# Allegro board emoji-car-pcb.brd
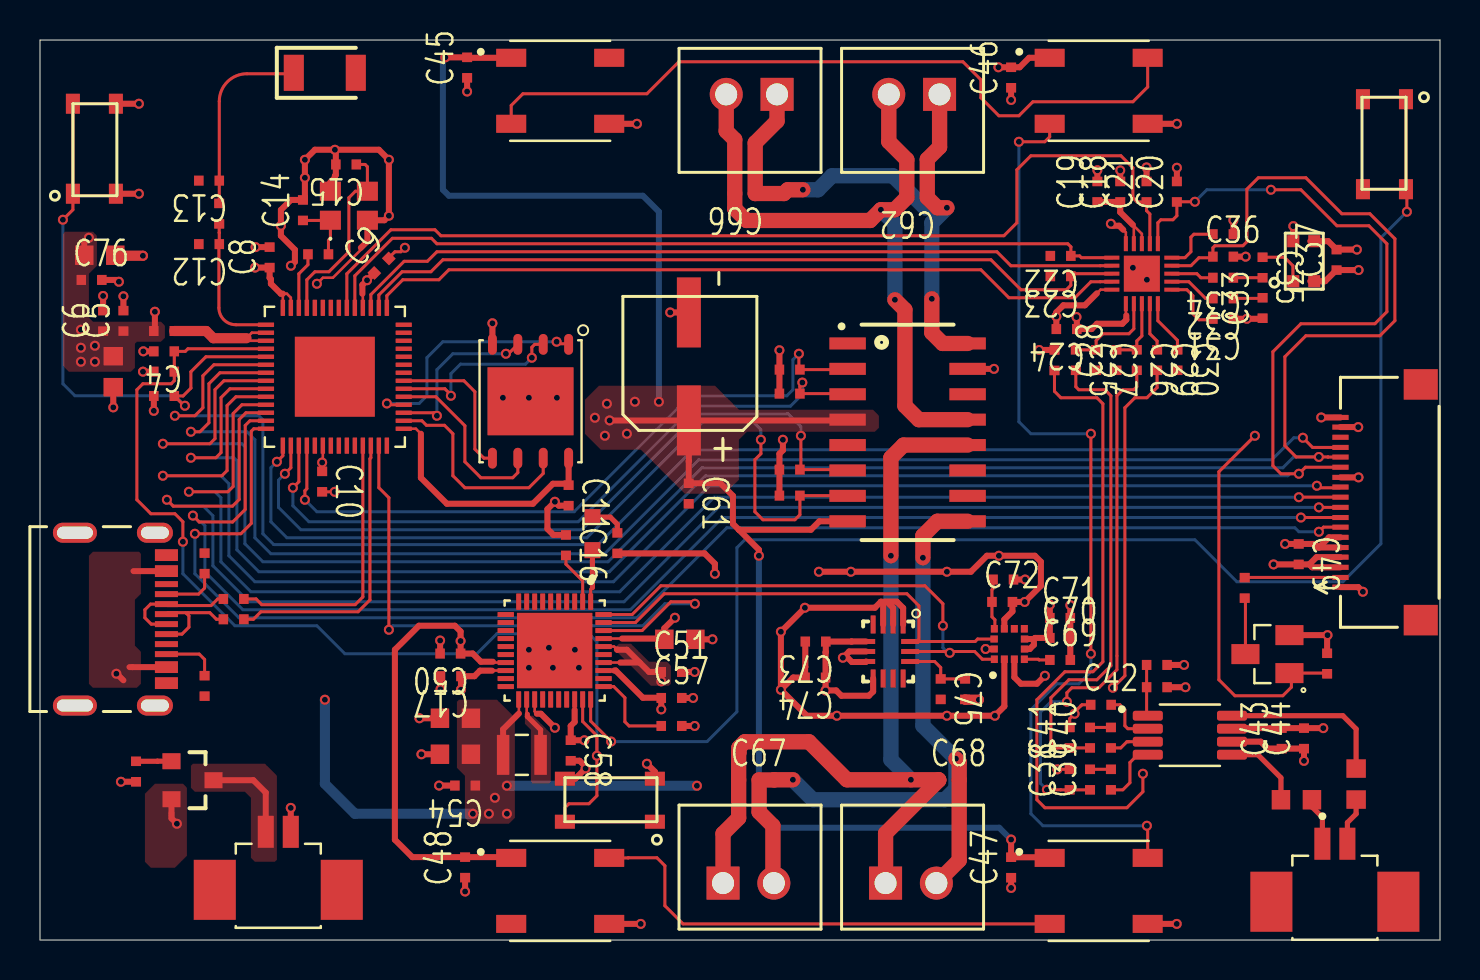
[diagram p0: board, top side]
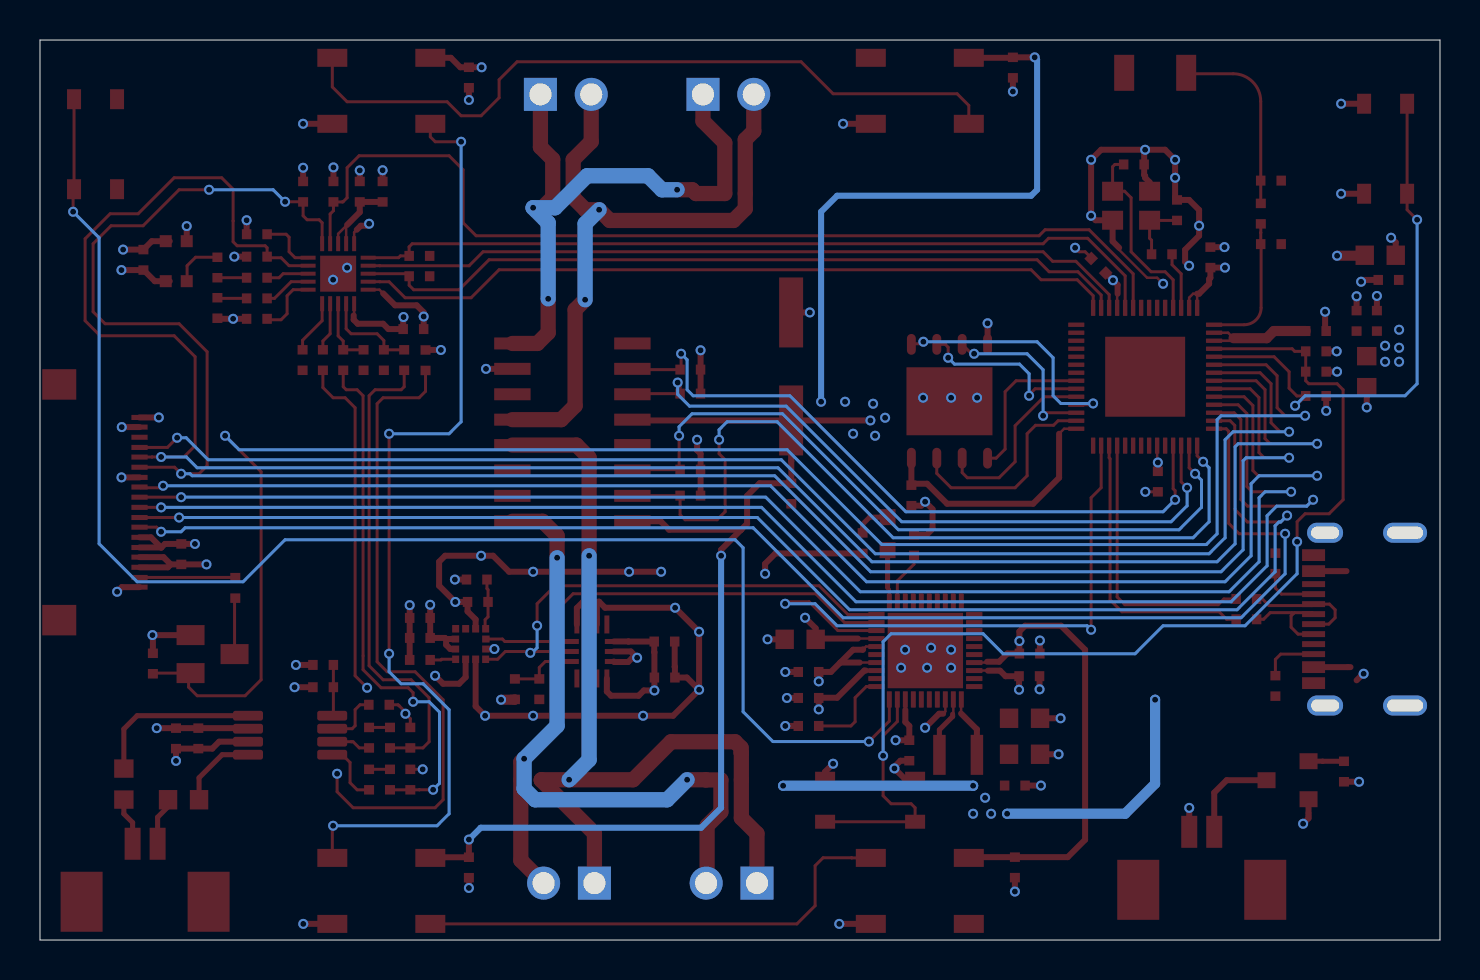
[diagram p1: board, bottom side, seen from below]

Outline 70 x 45 mm; copper layers: TOP, GND, PWR, BOTTOM. Coordinates in mm from the lower left corner of the outline.
Outline path: 0,45 0,0 70,0 70,45 0,45

## Design rules (mm)
constraint set DEFAULT: min track width 0.15
net group ESP_DP: nets ESP_DN ESP_DP
net group USB: nets USB_DN USB_DP

## Placement (name value [footprint] x y rotation side)
ANT1  ANT3216LL00R2400A  [ANTC3216X135N]  14.24 43.36 0 top
C4  1uF  [C0402]  6.2 29.43 180 top
C5  100nF  [C0402]  4.17 30.96 90 top
C6  1uF  [C0402]  3.15 30.96 90 top
C7  10uF  [C0603]  3.66 28.42 270 top
C8  100nF  [C0402]  11.48 34.13 90 top
C9  100nF  [C0402]  17.08 33.71 45 top
C10  100nF  [C0402]  14.11 22.92 270 top
C11  100nF  [C0402]  26.43 22.23 270 top
C12  -  [C0402]  8.45 34.79 180 top
C13  -  [C0402]  8.45 37.97 180 top
C14  15pF  [C0402]  13.15 36.49 90 top
C15  15pF  [C0402]  15.3 38.78 180 top
C16  1uF  [C0402]  26.3 19.74 270 top
C17  2.2uF  [C0402]  20.53 13.19 180 top
C18  100nF  [C0402]  54.01 37.41 90 top
C19  100nF  [C0402]  52.87 37.41 90 top
C20  22pF  [C0402]  56.84 37.41 90 top
C21  22pF  [C0402]  55.33 37.41 90 top
C22  22pF  [C0402]  51.03 34.2 180 top
C23  22pF  [C0402]  51.03 33.19 180 top
C24  1uF  [C0402]  51.33 30.55 180 top
C25  1uF  [C0402]  51.79 29 270 top
C26  1uF  [C0402]  54.84 29 270 top
C27  22pF  [C0402]  52.81 29 270 top
C28  22pF  [C0402]  53.82 29 90 top
C29  1uF  [C0402]  55.85 29 270 top
C30  1uF  [C0402]  56.87 29 270 top
C31  1uF  [C0402]  59.16 31.06 180 top
C32  1uF  [C0402]  59.16 32.08 180 top
C33  1uF  [C0402]  61.13 31.6 90 top
C34  1uF  [C0402]  59.16 33.11 180 top
C35  1uF  [C0402]  61.13 33.62 270 top
C36  22pF  [C0402]  59.16 34.17 0 top
C37  100nF  [C0402]  64.83 34.01 90 top
C38  22pF  [C0402]  51.48 8.02 90 top
C39  100nF  [C0402]  52.5 8.02 90 top
C40  100nF  [C0402]  52.5 10.12 90 top
C41  22pF  [C0402]  51.48 10.12 90 top
C42  1uF  [C0402]  53.05 11.76 0 top
C43  1uF  [C0402]  62.08 10.08 90 top
C44  1uF  [C0402]  63.2 10.08 90 top
C45  100nF  [C0402]  21.35 43.62 90 top
C46  100nF  [C0402]  48.55 43.12 90 top
C47  100nF  [C0402]  48.55 3.63 90 top
C48  100nF  [C0402]  21.25 3.63 90 top
C49  100nF  [C0402]  62.93 19.29 270 top
C50  1uF  [C0402]  20.52 14.32 180 top
C51  1uF  [C0402]  31.57 13.4 0 top
C52  22uF  [C0603]  20.77 9.29 180 top
C53  22uF  [C0603]  20.77 11.09 180 top
C54  100nF  [C0402]  21.26 7.72 180 top
C57  1uF  [C0402]  31.57 12.1 0 top
C58  1uF  [C0402]  26.53 9.48 270 top
C59  22uF  [C0603]  31.99 15.03 0 top
C60  100uF  [SMD_2P_63_54]  -232.16 -222.42 0 top
C61  100nF  [C0402]  32.43 22.32 270 top
C62  100nF  [C0402]  43.85 37.12 180 top
C66  100nF  [C0402]  35.25 37.32 180 top
C67  100nF  [C0402]  35.44 8 0 top
C68  100nF  [C0402]  45.45 8 0 top
C69  100nF  [C0402]  51 14 0 top
C70  100nF  [C0402]  51 15.1 0 top
C71  1uF  [C0402]  51 16.1 0 top
C72  100nF  [C0402]  48.11 16.9 0 top
C73  100nF  [C0402]  38.78 14.92 180 top
C74  1uF  [C0402]  38.77 13.12 180 top
C75  100nF  [C0402]  45.03 12.54 270 top
C76  100nF  [C0402]  2.58 33 0 top
D1  LED_B  [LED_APT1608QBC_D]  27.62 20.32 90 top
IC1  ES8311  [QFN40P300X300X60-21N]  55.09 33.32 270 top
J1  TYPEC-16P  [MOLEX_2171790001]  2.9 16.04 270 top
J2  ZX-MX1.25-2PLT  [AMPHENOL_10114830-10102LF]  11.91 2.71 0 top
J4  ZX-XH2.54-2PZZ  [HX254-1X2]  44.98 42.28 0 top
J5  ZX-XH2.54-2PZZ  [HX254-1X2]  36.85 42.28 0 top
J6  ZX-XH2.54-2PZZ  [HX254-1X2]  42.28 2.84 180 top
J7  ZX-XH2.54-2PZZ  [HX254-1X2]  34.15 2.84 180 top
J8  ZX-MX1.25-2PLT  [AMPHENOL_10114830-10102LF]  64.74 2.11 0 top
L4  WPN252012H1R0MT  [IND_LQH2HPZ1R0MGRL]  24.09 9.26 180 top
L5  LQG15HS2N0S02D  [R0402]  8.96 36.32 90 top
L6  MLG1005S2N0BT000  [R0402]  6.2 30.45 180 top
L7  SDCL1005C24NJTDF  [R0402]  13.91 34.29 0 top
L8  GZ1608D601TF  [C0603]  65.81 7.8 90 top
L9  GZ1608D601TF  [C0603]  62.82 7.01 180 top
L10  BLM18PG121SN1D  [C0603]  2.99 34.24 0 top
Q1  AO3401A  [SOT23-3]  7.57 7.99 180 top
Q2  S8050  [SOT95P240X120-3N]  61.37 14.29 90 top
R1  10K  [R0402]  6.2 28.42 0 top
R2  10K  [R0402]  6.2 27.2 0 top
R3  1K  [R0402]  28.87 19.84 90 top
R4  10K  [R0402]  4.8 8.42 270 top
R5  5.1K  [R0402]  8.23 18.83 270 top
R6  5.1K  [R0402]  8.23 12.7 90 top
R7  22  [R0402]  9.68 17.05 0 top
R8  22  [R0402]  9.68 16.04 0 top
R9  0  [R0402]  50.72 28.99 90 top
R10  10K  [R0402]  59.16 35.29 180 top
R11  150K  [R0402]  53.55 8.02 270 top
R12  150K  [R0402]  53.55 10.12 270 top
R13  10K  [R0402]  55.84 12.64 0 top
R14  10K  [R0402]  55.84 13.75 180 top
R15  10K  [R0402]  31.57 10.7 0 top
R16  10K  [R0402]  37.48 28.52 180 top
R17  10K  [R0402]  37.48 27.32 180 top
R18  10K  [R0402]  37.48 23.52 180 top
R19  10K  [R0402]  37.48 22.22 180 top
R20  10  [R0402]  60.23 17.61 270 top
R21  1K  [R0402]  64.35 13.82 90 top
R22  10K  [R0402]  48.16 18.02 180 top
R23  10K  [R0402]  46.25 12.54 90 top
S1  TS3425BA  [SMD_4P_42_32]  66 43.04 270 top
S2  TS3425BA  [SMD_4P_42_32]  31.74 8.21 180 top
S3  TS3425BA  [SMD_4P_42_32]  3.94 36.31 90 top
U1  ESP32-S3R8  [QFN40P700X700X90-57N]  14.74 28.16 0 top
U2  -  [W25Q128JVPIQ]  24.53 26.94 270 top
U3  TC1508S  [SOIC127P686X203-16N]  43.38 25.38 0 top
U4  XF2M-1815-1A  [OMRON_XF2M-1815-1A]  62.59 21.89 270 top
U5  ZTS6216  [SMD_4P_28_19]  63.96 34.94 180 top
U6  AXP2101  [QFN40P500X500X90-41N]  25.73 14.47 270 top
U7  LIS3MDLTR  [XDCR_LIS3MDLTR]  48.47 14.8 90 top
U8  LSM6DS3TR-C  [LGA-14-25X3MM]  42.41 14.43 270 top
U9  NS4150B  [SOP65P490X110-8N]  57.49 10.24 0 top
U10  WS2812B-B  [LED_WS2812B-B]  26.01 42.46 0 top
U11  WS2812B-B  [LED_WS2812B-B]  52.93 42.46 0 top
U12  WS2812B-B  [LED_WS2812B-B]  26.01 2.45 0 top
U13  WS2812B-B  [LED_WS2812B-B]  52.93 2.45 0 top
Y1  SX2B40.000F1510F30  [KC2520K120000C10E00]  15.44 36.71 0 top

## Library data of the parts
ANT1 = ANT3216LL00R2400A
C4-C6 C8-C51 C54 C57 C58 C61 C62 C66-C76 = C0402
C7 C52 C53 C59 = C0603
C60 = CAPACITOR POL
D1 = LED
IC1 = ES8311
J1 = TYPEC - 16Pin
J2 J8 = ZX-MX1.25-2PLT
J4-J7 = ZX-XH2.54-2PZZ
L4 = WPN252012H1R0MT
L5 = LQG15HS2N0S02D
L6 = MLG1005S2N0BT000
L7 = SDCL1005C24NJTDF
L8 L9 = GZ1608D601TF
L10 = BLM18PG121SN1D
Q1 = AO3401A
Q2 = S8050
R1-R23 = R0402
S1-S3 = TS3425BA
U1 = ESP32-S3R8
U2 = W25Q128JVPIQ
U3 = TC1508S
U4 = FPC-18Pin
U5 = ZTS6216
U6 = AXP2101
U7 = LIS3MDLTR
U8 = LSM6DS3TR-C
U9 = NS4150B
U10-U13 = WS2812B-B
Y1 = SX2B40.000F1510F30

## Footprints (pads in the part's own frame, mm; a bottom-side part is the same pattern mirrored in y, then rotated)
AMPHENOL_10114830-10102LF
  rect 0.8x1.6 smd: 1(-0.625,2.7) 2(0.625,2.7)
  rect 2.1x3 smd: SH1(-3.175,-0.2) SH2(3.175,-0.2)
ANTC3216X135N
  rect 1x1.8 smd: 1(-1.55,0) 2(1.55,0)
C0402
  rect 0.475x0.5 smd: 1(-0.512,0) 2(0.512,0)
C0603
  rect 0.92x0.97 smd: 1(-0.775,0) 2(0.775,0)
HX254-1X2
  rect 1.65x1.65 hole 1.1: 1(0,0)
  round 1.65 hole 1.1: 2(-2.54,0)
IND_LQH2HPZ1R0MGRL
  rect 0.625x2 smd: 1(-0.938,0) 2(0.938,0)
KC2520K120000C10E00
  rect 1.05x0.95 smd: 1(-0.925,-0.725) 2(0.925,-0.725) 3(0.925,0.725) 4(-0.925,0.725)
LED_APT1608QBC_D
  rect 0.8x0.8 smd: 1(-0.825,0) 2(0.825,0)
LED_WS2812B-B
  rect 1.5x0.9 smd: 1(-2.45,1.65) 2(-2.45,-1.65) 3(2.45,-1.65) 4(2.45,1.65)
LGA-14-25X3MM
  rect 0.9x0.25 smd: 1(-1.35,0.75) 2(-1.35,0.25) 3(-1.35,-0.25) 4(-1.35,-0.75) 8(1.35,-0.75) 9(1.35,-0.25) 10(1.35,0.25) 11(1.35,0.75)
  rect 0.25x0.9 smd: 5(-0.5,-1.1) 6(0,-1.1) 7(0.5,-1.1) 12(0.5,1.1) 13(0,1.1) 14(-0.5,1.1)
MOLEX_2171790001
  rect 0.59x1.15 smd: A1B12(-3.2,3.425) A4B9(-2.4,3.425) B1A12(3.2,3.425) B4A9(2.4,3.425)
  rect 0.298x1.15 smd: A5(-1.25,3.425) A6(-0.25,3.425) A7(0.25,3.425) A8(1.25,3.425) B5(1.75,3.425) B6(0.75,3.425) B7(-0.75,3.425) B8(-1.75,3.425)
  oval 1x2.2 hole 0.6x1.8: SH1(-4.32,-1.15) SH2(4.32,-1.15)
  oval 1x1.8 hole 0.6x1.4: SH3(-4.32,2.85) SH4(4.32,2.85)
OMRON_XF2M-1815-1A
  rect 0.254x0.813 smd: 1(4.242,2.438) 2(3.759,2.438) 3(3.251,2.438) 4(2.743,2.438) 5(2.261,2.438) 6(1.753,2.438) 7(1.245,2.438) 8(0.762,2.438) 9(0.254,2.438) 10(-0.254,2.438) 11(-0.762,2.438) 12(-1.245,2.438) 13(-1.753,2.438) 14(-2.261,2.438) 15(-2.743,2.438) 16(-3.251,2.438) 17(-3.759,2.438) 18(-4.242,2.438)
  rect 1.524x1.702 smd: 19(-5.893,6.452) 20(5.893,6.452)
QFN40P300X300X60-21N
  rect 0.75x0.2 smd: 1(-1.5,0.8) 2(-1.5,0.4) 3(-1.5,0) 4(-1.5,-0.4) 5(-1.5,-0.8) 11(1.5,-0.8) 12(1.5,-0.4) 13(1.5,0) 14(1.5,0.4) 15(1.5,0.8)
  rect 0.2x0.75 smd: 6(-0.8,-1.5) 7(-0.4,-1.5) 8(0,-1.5) 9(0.4,-1.5) 10(0.8,-1.5) 16(0.8,1.5) 17(0.4,1.5) 18(0,1.5) 19(-0.4,1.5) 20(-0.8,1.5)
  rect 1.8x1.8 smd: 21(0,0)
QFN40P500X500X90-41N
  custom 0.82x0.25 smd: 1(-2.445,1.8) 2(-2.445,1.4) 3(-2.445,1) 4(-2.445,0.6) 5(-2.445,0.2) 6(-2.445,-0.2) 7(-2.445,-0.6) 8(-2.445,-1) 9(-2.445,-1.4) 10(-2.445,-1.8) 21(2.445,-1.8) 22(2.445,-1.4) 23(2.445,-1) 24(2.445,-0.6) 25(2.445,-0.2) 26(2.445,0.2) 27(2.445,0.6) 28(2.445,1) 29(2.445,1.4) 30(2.445,1.8)
  custom 0.25x0.82 smd: 11(-1.8,-2.445) 12(-1.4,-2.445) 13(-1,-2.445) 14(-0.6,-2.445) 15(-0.2,-2.445) 16(0.2,-2.445) 17(0.6,-2.445) 18(1,-2.445) 19(1.4,-2.445) 20(1.8,-2.445) 31(1.8,2.445) 32(1.4,2.445) 33(1,2.445) 34(0.6,2.445) 35(0.2,2.445) 36(-0.2,2.445) 37(-0.6,2.445) 38(-1,2.445) 39(-1.4,2.445) 40(-1.8,2.445)
  rect 3.77x3.77 smd: 41(0,0)
QFN40P700X700X90-57N
  custom 0.81x0.22 smd: 1(-3.445,2.6) 2(-3.445,2.2) 3(-3.445,1.8) 4(-3.445,1.4) 5(-3.445,1) 6(-3.445,0.6) 7(-3.445,0.2) 8(-3.445,-0.2) 9(-3.445,-0.6) 10(-3.445,-1) 11(-3.445,-1.4) 12(-3.445,-1.8) 13(-3.445,-2.2) 14(-3.445,-2.6) 29(3.445,-2.6) 30(3.445,-2.2) 31(3.445,-1.8) 32(3.445,-1.4) 33(3.445,-1) 34(3.445,-0.6) 35(3.445,-0.2) 36(3.445,0.2) 37(3.445,0.6) 38(3.445,1) 39(3.445,1.4) 40(3.445,1.8) 41(3.445,2.2) 42(3.445,2.6)
  custom 0.22x0.81 smd: 15(-2.6,-3.445) 16(-2.2,-3.445) 17(-1.8,-3.445) 18(-1.4,-3.445) 19(-1,-3.445) 20(-0.6,-3.445) 21(-0.2,-3.445) 22(0.2,-3.445) 23(0.6,-3.445) 24(1,-3.445) 25(1.4,-3.445) 26(1.8,-3.445) 27(2.2,-3.445) 28(2.6,-3.445) 43(2.6,3.445) 44(2.2,3.445) 45(1.8,3.445) 46(1.4,3.445) 47(1,3.445) 48(0.6,3.445) 49(0.2,3.445) 50(-0.2,3.445) 51(-0.6,3.445) 52(-1,3.445) 53(-1.4,3.445) 54(-1.8,3.445) 55(-2.2,3.445) 56(-2.6,3.445)
  rect 4x4 smd: 57(0,0)
R0402
  rect 0.475x0.5 smd: 1(-0.512,0) 2(0.512,0)
SMD_2P_63_54
  rect 1.2x3.5 smd: 1(264.6,248.4) 2(264.6,253.8)
SMD_4P_28_19
  rect 0.6x0.6 smd: 1(1.3,2) 2(1.3,0) 3(0.25,0) 4(0.25,2)
SMD_4P_42_32
  rect 1x0.7 smd: 1(1,2.3) 2(5.5,2.3) 3(1,0.15) 4(5.5,0.15)
SOIC127P686X203-16N
  rect 1.82x0.6 smd: 1(-3,4.445) 2(-3,3.175) 3(-3,1.905) 4(-3,0.635) 5(-3,-0.635) 6(-3,-1.905) 7(-3,-3.175) 8(-3,-4.445) 9(3,-4.445) 10(3,-3.175) 11(3,-1.905) 12(3,-0.635) 13(3,0.635) 14(3,1.905) 15(3,3.175) 16(3,4.445)
SOP65P490X110-8N
  custom 1.5x0.49 smd: 1(-2.105,0.975) 2(-2.105,0.325) 3(-2.105,-0.325) 4(-2.105,-0.975) 5(2.105,-0.975) 6(2.105,-0.325) 7(2.105,0.325) 8(2.105,0.975)
SOT23-3
  rect 0.9x0.8 smd: 1(1,-0.95) 2(1,0.95) 3(-1.1,0)
SOT95P240X120-3N
  rect 1x1.4 smd: 1(-0.95,-1.1) 2(0.95,-1.1) 3(0,1.1)
W25Q128JVPIQ
  oval 1.04x0.445 smd: 1(-2.846,1.905) 2(-2.846,0.635) 3(-2.846,-0.635) 4(-2.846,-1.905) 5(2.846,-1.905) 6(2.846,-0.635) 7(2.846,0.635) 8(2.846,1.905)
  rect 3.4x4.3 smd: 9(0,0)
XDCR_LIS3MDLTR
  rect 0.375x0.35 smd: 1(-0.762,0.75) 2(-0.762,0.25) 3(-0.762,-0.25) 4(-0.762,-0.75) 7(0.762,-0.75) 8(0.762,-0.25) 9(0.762,0.25) 10(0.762,0.75)
  rect 0.35x0.375 smd: 5(-0.25,-0.762) 6(0.25,-0.762) 11(0.25,0.762) 12(-0.25,0.762)

## Nets
GND: C4.2 C5.2 C6.2 C7.2 C8.2 C9.2 C10.2 C11.2 C12.2 C13.2 C14.2 C15.2 C16.1 C17.2 C45.1 C46.1 C47.1 C48.1 C49.1 C50.2 C51.2 C52.2 C53.2 C54.2 C57.2 C58.2 C59.2 C60.2 C61.2 C69.2 C70.2 C71.2 C72.2 C73.2 C74.2 C75.2 C76.2 J1.A1B12 J1.B1A12 J1.SH1 J1.SH2 J1.SH3 J1.SH4 J2.2 Q2.2(E) R4.2 R5.1 R6.1 R9.2 R15.2 R16.2 R17.2 R18.2 R19.2 R21.2 S1.3 S1.4 S2.3 S2.4 S3.3 S3.4 U1.57 U2.4 U2.9 U3.11 U3.15 U4.1 U4.5 U4.6 U4.12 U4.18 U6.3 U6.41 U7.2 U7.3 U7.9 U7.12 U8.1 U8.2 U8.3 U8.6 U8.7 U10.3(VSS) U11.3(VSS) U12.3(VSS) U13.3(VSS) Y1.2 Y1.4(GND#4)
GND_SIGNAL: C18.2 C19.2 C20.2 C21.2 C22.2 C23.2 C24.2 C27.2 C28.1 C29.2 C30.2 C31.1 C33.1 C36.2 C37.2 C38.2 C41.2 C42.1 C43.2 C44.2 IC1.5 IC1.10 IC1.21 R9.1 R10.1 R13.2 U5.2 U5.3 U9.7
VBAT: C57.1 Q1.2(S) U6.33
VBAT_IN: J2.1 Q1.3
VBUS_5V: C59.1 J1.A4B9 J1.B4A9(VBUS2) U6.37
VCC_3V3: C49.2 C52.1 C53.1 C54.1 C70.1 C71.1 C73.1 C74.1 L4.2 L10.2 R22.1 R23.1 U4.3 U4.4 U4.17 U6.21 U7.5 U7.6(VDD_IO) U8.5(VDDIO) U8.8
VCC_5V: C45.2 C46.2 C47.2 C48.2 C50.1 C51.1 C60.1 C61.1 R3.1 U3.4 U3.8(VDD#8) U6.17 U6.23 U6.34(VSYS) U6.36 U10.1 U11.1 U12.1 U13.1
VCCA_3V3: C17.1 C18.1 C19.1 C24.1 C37.1 C43.1 C44.1 IC1.3 IC1.4 IC1.11 R14.1 U5.4(VDD) U6.18 U9.6
VDD_SPI: C11.1 U1.29 U2.8(VCC)
BOOT: R2.2 S3.1 S3.2 U1.5
ESP_3V3: C5.1 C6.1 C7.1 C8.1 C9.1 C10.1 C76.1 L6.2 L10.1 R1.1 R2.1 U1.20 U1.46 U1.55 U1.56
ESP_DN: R7.2 U1.25
ESP_DP: R8.2 U1.26
ESP_EN: C4.1 R1.2 S2.1 S2.2 U1.4 U6.29
I2C0_SCL: U6.40 U7.1 U8.13
I2C0_SDA: U6.39 U7.11 U8.14
I2C1_SCL: C20.1 IC1.1 U1.9 U4.13
I2C1_SDA: C36.1 IC1.19 U1.8 U4.14
I2S_ASDOUT: IC1.7 U1.45
I2S_DSDIN: IC1.9 U1.43
I2S_LRCK: C23.1 IC1.8 U1.44
I2S_MCLK: C21.1 IC1.2 U1.48
I2S_SCLK: C22.1 IC1.6 U1.47
INA: R16.1 U1.18 U3.2
INB: R17.1 U1.17 U3.3
INC: R18.1 U1.16 U3.6
IND: R19.1 U1.15 U3.7
LAN: C12.1 L5.1 U1.1
LCD_BL: R20.1 U4.2
LCD_BLK: Q2.1 R21.1 U1.6
LCD_DC: U1.14 U4.7
LCD_RST: U1.10 U4.11
MIC_N: C32.1 C33.2
MIC_P: C34.1 C35.2
OSC_IN: L7.1 U1.54(XTAL_P)
OSC_OUT: C15.1 U1.53 Y1.3
OUTA: C62.1 C66.1 J4.1 J5.1 U3.16
OUTB: C62.2 C66.2 J4.2 J5.2 U3.13
OUTC: C67.1 C68.1 J6.1 J7.1 U3.12
OUTD: C67.2 C68.2 J6.2 J7.2 U3.9
OUTN: C26.2 C38.1 C39.1
OUTP: C25.2 C40.1 C41.1
PA_CTRL: R13.1 R14.2 U9.1
PA_INL+: R12.2 U9.3
PA_INL-: R11.2 U9.4
PA_OUTL+: L8.2 U9.8(VOP)
PA_OUTL-: L9.2 U9.5
PMIC_IRQ: U1.27 U6.38
PWRON: S1.1 S1.2 U6.30
SPI_CS: U1.13 U4.8
SPI_MOSI: U1.11 U4.10
SPI_SCLK: U1.12 U4.9
SPICLK: U1.33 U2.6
SPICS0: U1.32 U2.1
SPID: U1.35 U2.5
SPIHD: U1.30 U2.7
SPIQ: U1.34 U2.2
SPIWP: U1.31 U2.3
TP_RST: U1.7 U4.15
TS: R15.1 U6.31
USB_DN: J1.A7 J1.B7 R7.1
USB_DP: J1.A6 J1.B6 R8.1
VRTC: C58.1 U6.28
N01130: L6.1 U1.2 U1.3
N03351: ANT1.1 C13.1 L5.2
N04664: C14.1 L7.2 Y1.1
N11192: L4.1 U6.22
N11703: D1.1(C) U6.1
N11707: D1.2 R3.2
N11773: C16.2 U6.2
N17818: Q1.1 R4.1
N17977: J1.A5 R5.2
N18429: J1.B5 R6.2
N19355: C25.1 C27.1 IC1.12
N20097: C26.1 C28.2 IC1.13
N20546: C29.1 IC1.14
N20555: C30.1 IC1.15
N21105: C31.2 IC1.16(VMID)
N21209: C32.2 IC1.17
N21523: C34.2 IC1.18
N21649: C35.1 U5.1
N23102: IC1.20 R10.2
N24693: C39.2 R11.1
N24991: C40.2 R12.1
N25221: C42.2 U9.2
N29972: J8.2 L8.1
N29976: J8.1 L9.1
N32029: U10.2 U11.4
N32033: U11.2 U13.4
N32082: U12.4 U13.2
N41828: Q2.3 R20.2
N42137: C69.1 U7.4
N42835: C72.1 R22.2 U7.10
N43955: C75.1 R23.2 U8.12

Pads without a net: ANT1 2; J1 A8 B8; J2 SH1 SH2; J8 SH1 SH2; U1 19 21 22 23 24 28 36 37 38 39 40 41 42 49 50 51 52; U3 1 5 10 14; U4 16 19 20; U6 4 5 6 7 8 9 10 11 12 13 14 15 16 19 20 24 25 26 27 32 35; U7 7 8; U8 4 9 10 11; U10 4; U12 2

## Via types
v1: diameter 0.5, hole 0.3, TOP to BOTTOM, 205 vias

## Routing (per net, layer and track width the routed paths; a pad name or vN(x,y) marks a point on that pad's centre or on a via; arc(x,y) is an arc through that point)
GND: length 128.2
  TOP w0.127: 16.04,34.61 16.04,34.51 14.64,33.11 14.14,33.11 v1(13.84,32.81)
  TOP w0.15: C10.2 v1(14.73,22.41) ; v1(18.24,34.61) 18.04,34.41 17.74,34.41 17.44,34.11 C9.2
  TOP w0.3: C48.1 v1(21.25,2.42) ; C51.2 v1(32.73,13.4) ; v1(37.04,12.51) 37.65,13.12 C74.2 38.25,13.65 38.26,13.66 C73.2 ; v1(37.04,12.51) 38.34,11.21 v1(39.84,11.21) v1(45.34,11.21) v1(47.74,11.21) 48.22,11.69 U7.2 ; v1(37.04,12.51) v1(37.04,15.41) v1(38.24,16.61) 41.74,16.61 42.04,16.91 ; S2.4 26.76,8.06 v1(27.28,8.58) 27.28,8.66 26.98,8.96 C58.2 ; v1(30.34,8.81) 30.74,8.41 S2.3 ; 28.46,0.8 v1(30.04,0.8) ; U8.3 42.16,16.8 42.04,16.91 ; J2.2 v1(12.54,6.61) ; C60.2 v1(31.51,31.38) ; 63.94,19.63 64.45,20.13 U4.6 ; 63.94,19.63 63.93,19.63 63.75,19.8 C49.1 v1(62.25,19.8) ; 63.94,19.63 U4.5 ; 28.46,40.81 v1(29.85,40.81) ; C7.2 v1(3.66,26.63) ; U7.3 48.72,13.14 49.04,12.81 49.84,12.81 v1(50.24,13.21) ; U3.15 v1(47.7,28.56) ; 42.04,16.91 42.34,16.91 ; 42.34,16.91 42.84,16.91 43.16,16.6 U8.1 ; 42.34,16.91 42.66,16.6 U8.2 ; C54.2 v1(19.95,7.72) ; Q2.2 v1(64.38,15.24) 64.35,15.22 R21.2 ; U8.7 41.28,13.9 40.59,13.9 40.38,14.11 v1(40.14,14.11) 40.46,14.43 U8.6 ; C59.2 v1(33.62,15.03) ; S3.3 v1(4.94,37.31) ; U13.3 v1(56.84,0.8) ; v1(37.14,25.01) 37.14,24.49 36.97,24.31 R18.2 R19.2 ; v1(14.74,39.51) 14.79,39.47 C15.2 14.79,38.25 14.74,38.2 14.74,38.11 14.52,37.89 14.52,37.44 ; v1(14.74,39.51) 16.94,39.51 v1(17.44,39.01) v1(17.44,36.21) 17.22,35.99 16.37,35.99 16.37,34.94 16.04,34.61 ; v1(14.74,39.51) 13.74,39.51 v1(13.24,39.01) v1(13.24,38.11) 13.24,37 C14.2 12.54,37 12.04,36.5 v1(12.04,35.71) 12.04,35.21 12.74,34.51 12.74,33.91 v1(12.54,33.71) ; v1(36.97,29.49) R16.2 R17.2 ; v1(51.52,16.74) C71.2 C70.2 C69.2 ; S3.4 v1(4.94,41.81) ; v1(3.94,32.91) 3.85,33 C76.2 ; C4.2 v1(5.16,29.43) ; U11.3 v1(56.85,40.81) ; C45.1 v1(21.35,42.42) ; C5.2 v1(4.17,32.19) ; U4.18 v1(64.06,26.13) ; C16.1 25.67,20.25 25.37,20.56 25.37,21.54 v1(25.74,21.91) 25.94,21.72 C11.2 ; R9.2 v1(49.96,29.5) ; C57.2 v1(32.65,12.1) ; C52.2 v1(19.07,9.29) ; C17.2 v1(20.02,12.53) ; 48.22,15.56 48.22,16.03 48.62,16.43 C72.2 v1(49.23,16.9) 50.04,17.71 50.04,18.91 49.74,19.21 v1(47.94,19.21) 47.34,19.21 46.54,18.41 v1(45.34,18.41) v1(40.54,18.41) v1(38.94,18.41) ; C8.2 v1(10.78,34.64) ; C46.1 v1(48.55,42) ; U4.1 65.91,17.64 v1(66.14,17.41) ; U2.4 v1(22.62,30.84) ; U4.12 v1(65.93,23.13) ; U7.12 v1(47.28,14.55) ; C47.1 v1(48.55,2.6) ; R15.2 v1(32.73,10.7) ; R4.2 v1(4.05,7.91) ; C6.2 v1(3.15,32.2) ; C50.2 v1(20.01,14.97) ; C53.2 v1(18.97,11.09)
  vias: v1(23.14,27.11) v1(24.44,27.11) v1(24.44,14.51) v1(24.44,13.61) v1(25.44,14.61) v1(25.64,13.61) v1(25.84,27.11) v1(26.74,14.51) v1(26.94,13.61)
GND_SIGNAL: length 71.5
  TOP w0.127: 54.16,35.51 54.29,35.38 IC1.5 ; IC1.10 53.03,32.52 52.84,32.33
  TOP w0.15: 51.5,8.55 C38.2 v1(50.87,8.53) ; C41.2 51.48,11.07 v1(51.73,11.31) 51.73,11.4 52.04,11.71 52.05,11.71 52.09,11.76 C42.1 ; R9.1 50.72,27.43 51.04,27.11 52.84,27.11 53.14,26.81 53.14,13.91 52.64,13.41 51.24,13.41 49.84,12.01 49.84,7.01 50.24,6.61 54.34,6.61 55.14,7.41 v1(55.14,8.31) ; C29.2 55.85,27.62 55.34,27.11 54.74,27.11 54.24,26.61 54.24,13.21 v1(53.64,12.61)
  TOP w0.3: 59.77,31.06 v1(60.34,31.06) 61.1,31.06 C33.1 ; U9.7 59.63,10.59 C43.2 C44.2 v1(64.16,10.59) ; R13.2 v1(57.27,12.64) ; 54.16,35.51 53.96,35.71 53.64,35.71 v1(53.54,35.81) ; 63.51,34.94 U5.3 64.41,34.94 C37.2 v1(65.84,34.52) ; C20.2 v1(56.84,38.61) ; C21.2 v1(55.33,38.63) ; R10.1 v1(59.67,35.99) ; C18.2 v1(54.01,38.48) ; C24.2 v1(50.82,31.17) 50.82,31.38 51.17,31.74 52.25,31.74 52.84,32.33 ; U5.2 v1(62.66,35.69) ; C36.2 v1(60.28,34.17) ; C19.2 v1(52.87,38.49)
  vias: v1(54.64,33.61) v1(55.34,33.01)
VBAT: length 35.9
  TOP w0.127: 28.7,13.47 U6.33
  TOP w0.3: v1(31.06,11.53) C57.1 31.05,12.11 30.14,12.11 28.78,13.47 28.7,13.47 ; v1(6.84,5.81) 6.57,6.08 Q1.2
  PWR w0.3: v1(6.84,5.81) 7.94,4.71 29.24,4.71 31.14,6.61 31.14,11.45 v1(31.06,11.53)
VBAT_IN: length 4.8
  TOP w0.3: J2.1 11.29,7.37 10.67,7.99 Q1.3
VBUS_5V: length 46.3
  TOP w0.127: 29.1,15.07 U6.37
  TOP w0.3: v1(3.82,13.31) 3.84,13.31 4.17,12.99 ; J1.A4B9 4.68,18.44 ; 29.1,15.07 31.18,15.07 C59.1 31.22,15.58 v1(31.74,16.11) ; J1.B4A9 4.48,13.64
  PWR w0.3: v1(31.74,16.11) 29.54,13.91 29.54,9.41 27.74,7.61 25.54,7.61 23.94,9.21 20.74,9.21 19.94,10.01 4.54,10.01 3.82,10.74 v1(3.82,13.31)
VCC_3V3: length 130.5
  TOP w0.127: U6.21 23.94,12.02 23.94,11.32
  TOP w0.3: 49.69,15.05 U7.6 ; 49.69,15.05 49.75,15.1 C70.1 C71.1 v1(50.49,16.76) ; 49.69,15.05 49.69,14.76 49.48,14.55 U7.5 ; U4.4 63.83,19.14 63.46,18.78 ; U8.5 40.58,14.93 40.58,14.92 C73.1 39.29,14.4 39.28,14.39 C74.1 v1(39.28,12.48) 39.81,12.48 40.07,12.21 41.44,12.21 41.66,12.43 U8.8 ; U4.17 v1(65.91,25.65) ; 63.46,18.78 C49.2 v1(61.68,18.78) ; 63.46,18.78 63.61,18.63 U4.3 ; R22.1 v1(49.25,18.02) ; L4.2 23.15,10.53 23.94,11.32
  TOP w0.508: L10.2 3.79,34.21 v1(5.14,34.21) ; R23.1 46.27,12.01 v1(46.94,12.01)
  PWR w0.508: v1(49.25,18.02) 49.25,18 v1(50.49,16.76) ; v1(49.25,18.02) 50.01,18.78 v1(61.68,18.78) 61.74,18.71 61.74,16.91 62.44,16.21 66.14,16.21 67.44,17.51 67.44,25.21 67.01,25.65 v1(65.91,25.65) ; v1(49.25,18.02) 46.85,18.02 46.34,17.51 46.34,12.61 v1(46.94,12.01) 39.74,12.01 v1(39.28,12.48) 38.01,11.21 34.74,11.21 33.34,9.81 33.34,8.21 v1(32.84,7.71) ; v1(14.24,12.01) 14.24,14.21 10.94,17.51 10.94,19.77 6.5,24.21 5.35,24.21 4.54,25.01 4.54,31.71 5.14,32.31 v1(5.14,34.21)
  BOTTOM w0.508: v1(21.64,6.31) 15.75,6.31 14.24,7.81 v1(14.24,12.01) ; v1(32.84,7.71) v1(23.34,7.71)
  vias: v1(22.44,6.31) v1(22.74,7.11) v1(23.34,6.31)
VCC_5V: length 184.4
  TOP w0.127: 29.02,13.87 U6.34 ; U6.36 28.7,14.67 28.84,14.53 ; 22.64,13.91 22.68,13.87 U6.17 ; 24.84,11.31 24.73,11.42 U6.23
  TOP w0.3: v1(48.55,5.02) C47.2 50.45,4.14 U13.1 ; U3.4 40.34,25.98 C60.1 ; 28.84,14.53 28.86,14.51 29.34,14.51 29.98,13.87 ; C60.1 32.44,23.95 32.43,23.94 C61.1 34.02,22.84 34.64,22.21 34.64,20.81 34.94,20.51 ; C60.1 v1(28.48,25.98) ; U12.1 23.52,4.14 C48.2 18.62,4.14 17.74,5.01 17.74,14.51 18.94,15.71 20.74,15.71 21.03,15.43 v1(21.03,14.95) C50.1 21.63,14.32 22.04,13.91 22.64,13.91 ; 34.95,20.51 35.94,19.51 v1(35.94,19.21) ; 34.95,20.51 38.54,20.51 38.97,20.94 U3.8 ; 24.84,11.31 25.04,11.31 v1(25.74,10.61) ; R3.1 33.23,19.33 33.74,18.81 v1(33.74,18.31) ; 29.98,13.87 29.02,13.87 ; 29.98,13.87 30.45,13.4 C51.1 v1(31.06,12.93) ; U11.1 49.46,44.11 48.98,43.64 C46.2 v1(47.92,43.64) ; U10.1 21.38,44.11 C45.2 v1(20.26,44.13)
  PWR w0.3: v1(25.74,10.61) 25.64,10.51 22.14,10.51 21.74,10.91 21.74,13.31 21.03,14.03 v1(21.03,14.95) 21.04,14.96 21.04,16.31 22.44,17.71 33.84,17.71 34.64,16.91 34.64,14.31 34.23,13.9 31.73,13.9 31.06,13.23 v1(31.06,12.93) ; v1(20.26,44.13) 47.42,44.13 v1(47.92,43.64)
  BOTTOM w0.3: v1(48.55,5.02) 47.96,5.61 36.94,5.61 35.94,6.61 v1(35.94,19.21) ; v1(20.26,44.13) 20.14,44.01 20.14,37.51 20.44,37.21 30.14,37.21 30.94,36.41 v1(30.94,26.91)
  vias: v1(27.74,26.11) v1(28.24,25.21) v1(28.34,26.81) v1(29.34,25.31) v1(29.74,26.91)
VCCA_3V3: length 19.5
  TOP w0.127: 54.32,31.23 54.29,31.25 IC1.11 ; 54.69,35.71 55.09,35.31 IC1.3 ; 54.69,35.71 IC1.4 ; 54.69,35.71 54.64,35.76 ; 22.6,13.47 22.61,13.47 U6.18
  TOP w0.3: U9.6 61.04,9.91 61.39,9.57 C43.1 C44.1 v1(63.2,8.96) ; v1(65.93,33.5) C37.1 64.82,33.5 64.26,32.94 U5.4 63.51,32.94 ; 54.32,31.23 54.32,31.01 54.12,30.81 52.84,30.81 52.58,30.55 C24.1 51.84,31.13 v1(51.82,31.15) ; 54.64,35.76 54.01,36.39 C18.1 C19.1 ; v1(21.05,12.51) C17.1 21.72,13.19 22,13.47 22.6,13.47 ; R14.1 v1(57.2,13.75)
VDD_SPI: length 12.9
  TOP w0.127: U1.29 18.79,25.56 19.04,25.31
  TOP w0.3: U2.8 C11.1 26.36,22.81 25.64,22.81 24.64,21.81 20.34,21.81 19.04,23.11 19.04,25.31
BOOT: length 27.4
  TOP w0.15: v1(7.24,26.71) 7.2,26.71 R2.2 7.15,27.2 7.54,27.59 7.54,28.41 8.29,29.16 U1.5 ; v1(1.14,36.01) 1.64,36.51 S3.1 S3.2
  BOTTOM w0.15: v1(1.14,36.01) 1.14,27.81 1.74,27.21 6.74,27.21 v1(7.24,26.71)
ESP_3V3: length 44.7
  TOP w0.127: 12.16,31.62 U1.56 12.14,32.31 12.14,32.31 12.34,32.31 12.54,32.12 U1.55 ; 16.12,32.31 16.14,32.29 U1.46 ; 14.14,24.72 14.14,23.91 v1(14.11,23.87)
  TOP w0.3: 16.12,32.31 16.12,32.76 v1(16.35,32.99) C9.1 ; v1(2.44,35.11) 2.21,34.88 L10.1 ; R2.1 v1(5.69,26.46) ; v1(10.75,33.62) C8.1 11.48,33.11 11.54,33.04 11.54,32.81 12.04,32.31 12.14,32.31 ; C10.1 v1(14.11,23.87) ; v1(5.74,31.41) 5.74,30.5 L6.2 ; R1.1 v1(5.15,28.42)
  PWR w0.3: 6.14,29.01 6.34,29.21 6.34,30.81 v1(5.74,31.41) ; 6.14,29.01 6.14,26.91 v1(5.69,26.46) ; 6.14,29.01 5.55,28.42 v1(5.15,28.42) ; v1(14.11,23.87) 13.57,24.41 12.04,24.41 11.14,25.31 11.14,30.71 11.84,31.41 12.94,31.41 ; 12.94,31.41 14.78,31.41 v1(16.35,32.99) ; 12.94,31.41 10.75,33.61 v1(10.75,33.62) 10.54,33.41 7.14,33.41 5.44,35.11 v1(2.44,35.11)
  vias: v1(2.04,30.51) v1(2.04,29.61) v1(2.04,28.91) v1(2.74,29.71) v1(2.74,28.91)
ESP_DN: length 13.8
  TOP w0.151: R7.2 10.8,17.05 11.09,16.77 15.76,16.77 16.14,17.15 16.14,24.72
ESP_DP: length 14.4
  TOP w0.151: 16.54,24.72 16.54,24.11 16.5,24.06 16.5,17.01 15.9,16.41 11.04,16.41 10.67,16.04 R8.2
ESP_EN: length 59.8
  TOP w0.15: v1(7.14,19.91) 7.14,20.91 6.74,21.31 5.54,21.31 4.84,22.01 4.84,27.51 5.14,27.81 6.56,27.81 6.71,27.96 R1.2 C4.1 7.26,29.43 7.39,29.56 U1.4 ; S2.1 S2.2 26.24,6.61 26.44,6.81 27.44,6.81 27.84,7.21 v1(27.84,9.21) 27.84,10.21 27.13,10.92 U6.29
  BOTTOM w0.15: v1(7.14,19.91) 7.14,18.31 9.74,15.71 13.84,15.71 15.24,14.31 21.84,14.31 22.84,15.31 27.44,15.31 27.84,14.91 v1(27.84,9.21)
I2C0_SCL: length 25.2
  TOP w0.15: v1(45.14,15.71) 45.14,16.81 44.24,17.71 31.04,17.71 29.6,16.27 U6.40 27.98,16.27 ; U8.13 45.42,14.43 v1(45.48,14.36) 45.55,14.43 46.73,14.43 47.12,14.04 U7.1
  BOTTOM w0.15: v1(45.14,15.71) 45.14,14.61 45.4,14.36 v1(45.48,14.36)
I2C0_SDA: length 22.9
  TOP w0.15: 27.98,15.87 U6.39 29.77,15.87 31.21,17.31 43.34,17.31 43.94,16.71 43.94,15.04 43.83,14.93 ; 43.83,14.93 U8.14 ; 43.83,14.93 46.76,14.93 46.88,15.05 U7.11
I2C1_SCL: length 103.2
  TOP w0.15: v1(7.54,24.11) 8.79,24.11 9.05,24.37 9.05,27.12 9.49,27.56 U1.9 ; U4.13 63.27,23.64 v1(62.94,23.31) 62.04,23.31 61.64,23.71 61.64,29.41 63.04,30.81 66.74,30.81 67.34,31.41 67.34,34.81 66.44,35.71 64.84,35.71 63.04,37.51 v1(61.54,37.51) ; IC1.1 55.89,35.86 56.04,36.01 56.64,36.01 56.84,36.21 C20.1 56.85,36.91 v1(57.74,36.91)
  BOTTOM w0.15: v1(7.54,24.11) 9.69,24.11 9.84,23.96 9.84,19.51 10.94,18.41 28.47,18.41 33.27,23.21 62.39,23.21 62.49,23.31 v1(62.94,23.31) ; v1(57.74,36.91) 58.34,37.51 v1(61.54,37.51)
I2C1_SDA: length 107
  TOP w0.15: U1.8 9.19,27.96 8.75,27.52 8.75,25.07 8.49,24.81 v1(6.14,24.81) ; 56.59,33.72 57.55,33.72 57.94,34.11 58.59,34.11 C36.1 58.64,34.61 58.74,34.71 60.14,34.71 60.34,34.91 60.34,35.95 60.34,37.54 60.92,38.11 63.29,38.11 65.09,36.31 66.49,36.31 67.74,35.06 67.74,30.96 66.99,30.21 63.29,30.21 62.24,29.16 62.24,24.71 62.8,24.15 v1(63.94,24.15) 64.4,24.15 64.4,24.15 U4.14
  BOTTOM w0.15: v1(6.14,24.81) 10.09,24.81 10.24,24.66 10.24,19.81 11.14,18.91 28.4,18.91 33.1,23.61 62.14,23.61 62.68,24.15 v1(63.94,24.15)
I2S_ASDOUT: length 38.9
  TOP w0.15: U1.45 16.54,32.27 18.21,33.94 19.37,33.94 19.84,34.41 47.84,34.41 48.54,33.71 53.01,33.71 53.02,33.72 53.59,33.72
I2S_DSDIN: length 38.3
  TOP w0.15: IC1.9 53.02,32.92 53.01,32.91 52.54,32.91 51.74,32.11 48.44,32.11 47.04,33.51 20.44,33.51 19.94,33.01 18.14,33.01 17.34,32.21 U1.43
I2S_LRCK: length 39.2
  TOP w0.15: IC1.8 51.67,33.32 C23.1 51.54,32.74 51.32,32.51 49.05,32.51 47.55,34.01 20.14,34.01 19.54,33.41 18.1,33.41 16.94,32.25 U1.44
I2S_MCLK: length 49.9
  TOP w0.15: IC1.2 55.49,36.3 55.33,36.46 C21.1 54.88,36.9 54.87,36.91 54.84,36.91 54.64,37.11 54.64,38.61 54.04,39.21 49.54,39.21 48.84,38.51 48.84,35.86 48.19,35.21 20.04,35.21 19.74,35.51 17.54,35.51 15.34,33.31 U1.48
I2S_SCLK: length 40.9
  TOP w0.15: IC1.6 52.07,34.12 51.98,34.2 C22.1 51.54,34.21 51.54,34.66 51.39,34.81 19.84,34.81 19.57,35.08 17.62,35.08 15.74,33.21 U1.47
INA: length 35.1
  TOP w0.15: 13.34,24.72 13.34,22.56 13.24,22.46 v1(13.24,22.01) ; U3.2 40.34,28.52 R16.1 37.94,28.57 v1(37.94,29.31)
  BOTTOM w0.15: v1(37.94,29.31) 37.64,29.01 37.64,27.51 37.34,27.21 32.51,27.21 26.71,21.41 13.84,21.41 v1(13.24,22.01)
INB: length 35.2
  TOP w0.15: 12.94,24.72 12.94,22.91 v1(12.64,22.61) ; v1(38.12,27.87) 38.04,27.8 38.04,27.71 37.99,27.66 R17.1 40.35,27.32 U3.3
  BOTTOM w0.15: v1(38.12,27.87) 38.12,27.28 37.52,26.69 32.69,26.69 26.91,20.91 13.44,20.91 12.64,21.71 v1(12.64,22.61)
INC: length 37.2
  TOP w0.15: v1(12.24,23.31) 12.54,23.61 12.54,24.72 ; v1(38.04,25.21) 38.04,23.57 R18.1 40.34,23.52 U3.6
  BOTTOM w0.15: v1(12.24,23.31) 11.92,22.99 11.92,21.63 13.04,20.51 27.08,20.51 32.88,26.31 37.4,26.31 38.04,25.66 v1(38.04,25.21)
IND: length 41.5
  TOP w0.15: 12.14,24.72 12.14,24.21 v1(11.84,23.91) ; v1(36.04,25.01) 36.04,24.31 35.74,24.01 35.74,21.41 36.14,21.01 37.74,21.01 37.99,21.26 R19.1 40.37,22.22 U3.7
  BOTTOM w0.15: v1(11.84,23.91) 11.54,23.61 11.54,20.91 12.34,20.11 27.34,20.11 33.14,25.91 35.64,25.91 36.04,25.51 v1(36.04,25.01)
LAN: length 7
  TOP w0.15: U1.1 9.79,30.76 arc(9.19,31.01) 8.94,31.61 8.94,34.77 C12.1 8.96,35.37 8.96,35.37 L5.1
LCD_BL: length 4.8
  TOP w0.15: R20.1 60.24,18.13 U4.2
LCD_BLK: length 88.5
  TOP w0.15: U1.6 8.69,28.76 8.14,28.21 8.14,26.61 7.74,26.21 v1(6.74,26.21) ; v1(60.74,25.21) 58.94,23.41 58.94,13.01 59.74,12.21 62.14,12.21 62.57,12.64 62.57,13.25 Q2.1 64.32,13.34 R21.1
  BOTTOM w0.15: v1(60.74,25.21) 60.04,24.51 32.64,24.51 27.9,19.77 11.68,19.77 11.14,20.31 11.14,26.01 10.94,26.21 v1(6.74,26.21)
LCD_DC: length 70.7
  TOP w0.15: v1(63.94,20.41) 64.17,20.64 U4.7 ; U1.14 10.69,25.56 10.56,25.44 10.56,20.83 10.04,20.31 v1(7.74,20.31)
  BOTTOM w0.15: v1(7.74,20.31) 7.74,18.31 9.94,16.11 29.84,16.11 34.34,20.61 62.74,20.61 62.94,20.41 v1(63.94,20.41)
LCD_RST: length 73.9
  TOP w0.15: v1(63.84,22.71) 63.94,22.61 64.99,22.61 U4.11 ; v1(6.14,23.21) 9.09,23.21 9.35,23.47 9.35,26.72 9.79,27.16 U1.10
  BOTTOM w0.15: v1(6.14,23.21) 9.04,23.21 9.44,22.81 9.44,19.21 10.74,17.91 28.67,17.91 33.47,22.71 v1(63.84,22.71)
MIC_N: length 1.5
  TOP w0.15: C32.1 61.1,32.08 C33.2
MIC_P: length 1.5
  TOP w0.15: C34.1 61.13,33.11 C35.2
OSC_IN: length 2.9
  TOP w0.15: L7.1 13.4,33.77 12.94,33.31 U1.54
OSC_OUT: length 9.7
  TOP w0.15: U1.53 13.34,33.01 13.74,33.41 14.44,33.41 15.44,34.41 15.44,37.11 15.77,37.44 Y1.3 16.37,38.66 16.26,38.78 C15.1
OUTA: length 31.2
  TOP w0.762: v1(45.34,36.61) 44.87,36.61 C62.1 44.36,39.03 44.98,39.65 J4.1 ; J5.1 36.85,40.95 35.76,39.86 C66.1 37.2,37.32 37.39,37.51 v1(38.14,37.51) ; v1(44.59,32.06) 44.59,30.37 45.13,29.83 U3.16
  BOTTOM w0.762: v1(38.14,37.51) 38.9,37.51 39.6,38.21 42.64,38.21 44.24,36.61 v1(45.34,36.61) 44.59,35.86 v1(44.59,32.06)
OUTB: length 34.5
  TOP w0.762: J5.2 34.31,40.45 34.74,40.02 C66.2 34.74,36.56 35.32,35.98 41.51,35.98 v1(42.04,36.51) 42.73,36.51 C62.2 43.34,39.02 42.44,39.92 J4.2 ; U3.13 43.94,26.02 43.24,26.71 43.24,31.51 v1(42.74,32.01)
  BOTTOM w0.762: v1(42.74,32.01) 42.74,35.81 v1(42.04,36.51)
OUTC: length 44.9
  TOP w0.15: 44.94,8.02 C68.1
  TOP w0.762: J7.1 34.15,5.32 34.93,6.1 C67.1 34.93,9.36 34.94,9.37 34.94,9.61 35.24,9.91 38.44,9.91 40.34,8.01 v1(43.54,8.01) 44.93,8.01 C68.1 44.94,7.99 42.28,5.33 J6.1 ; U3.12 43.18,24.75 42.54,24.11 v1(42.54,19.21)
  BOTTOM w0.762: v1(43.54,8.01) 42.54,9.01 v1(42.54,19.21)
OUTD: length 38.6
  TOP w0.762: U3.9 44.87,20.94 44.14,20.21 v1(44.14,19.11) ; J7.2 36.64,2.89 36.64,5.71 35.96,6.4 C67.2 36.7,8 36.71,8.01 v1(37.64,8.01) ; v1(45.79,9.06) 45.96,8.9 C68.2 45.96,3.99 J6.2
  BOTTOM w0.762: v1(37.64,8.01) 38.64,7.01 45.24,7.01 45.79,7.56 v1(45.79,9.06) 44.14,10.71 v1(44.14,19.11)
OUTN: length 26.8
  TOP w0.15: C26.2 54.84,27.66 54.69,27.51 54.14,27.51 53.85,27.21 53.85,13.51 52.94,12.61 51.59,12.61 51.34,12.36 v1(51.34,11.91) ; C39.1 C38.1 51.03,7.51 51.03,7.51 v1(50.34,7.51)
  BOTTOM w0.15: v1(50.34,7.51) 50.02,7.83 50.02,11.39 50.54,11.91 v1(51.34,11.91)
OUTP: length 24.2
  TOP w0.15: C25.2 51.79,27.66 51.94,27.51 53.24,27.51 53.54,27.21 53.54,13.71 52.84,13.01 51.44,13.01 50.54,12.11 50.54,9.91 50.85,9.6 C41.1 C40.1
PA_CTRL: length 2.6
  TOP w0.15: R14.2 R13.1 55.33,11.27 U9.1
PA_INL+: length 2
  TOP w0.15: R12.2 54.04,9.6 54.34,9.91 54.44,9.91 54.44,9.91 U9.3
PA_INL-: length 3.2
  TOP w0.15: R11.2 54.14,7.51 54.5,7.87 54.5,8.88 54.88,9.26 U9.4
PA_OUTL+: length 8.5
  TOP w0.254: L8.2 65.81,10.55 65.14,11.21 U9.8
PA_OUTL-: length 4
  TOP w0.254: L9.2 62.05,8.11 60.89,9.26 U9.5
PMIC_IRQ: length 30.7
  TOP w0.15: v1(32.74,16.81) 32.64,16.91 31.54,16.91 30.1,15.47 U6.38 27.98,15.47 ; 16.94,24.72 16.94,22.62 17.44,22.11 v1(17.44,15.51)
  BOTTOM w0.15: v1(17.44,15.51) 17.64,15.71 30.14,15.71 31.24,16.81 v1(32.74,16.81)
PWRON: length 74.4
  TOP w0.15: v1(68.34,36.41) 68.34,37.49 S1.2 S1.1 ; v1(28.55,9.92) 27.53,10.94 U6.30
  BOTTOM w0.15: v1(28.55,9.92) 33.35,9.92 34.84,11.41 34.84,19.61 35.24,20.01 57.74,20.01 59.84,17.91 65.14,17.91 67.04,19.81 67.04,35.11 v1(68.34,36.41)
SPI_CS: length 70.9
  TOP w0.15: v1(7.64,21.22) 7.96,20.9 9.63,20.9 10.26,21.53 10.26,25.73 10.49,25.96 U1.13 ; v1(63.04,21.12) U4.8
  BOTTOM w0.15: v1(63.04,21.12) 34.13,21.12 29.52,16.51 10.14,16.51 8.24,18.41 8.24,20.71 8.06,20.9 7.96,20.9 v1(7.64,21.22)
SPI_MOSI: length 71.3
  TOP w0.15: U1.11 10.09,26.76 9.66,26.32 9.66,22.67 9.39,22.41 v1(7.44,22.41) ; v1(62.94,22.14) U4.10
  BOTTOM w0.15: v1(7.44,22.41) 8.74,22.41 9.04,22.11 9.04,18.91 10.54,17.41 28.98,17.41 33.71,22.14 v1(62.94,22.14)
SPI_SCLK: length 73.6
  TOP w0.15: v1(6.34,22.01) 6.66,21.69 9.62,21.69 9.96,22.03 9.96,26.03 10.29,26.36 U1.12 ; 65.02,21.63 v1(63.94,21.63)
  BOTTOM w0.15: v1(6.34,22.01) 6.66,21.69 8.16,21.69 8.64,21.21 8.64,18.71 10.44,16.91 29.2,16.91 33.92,21.63 v1(63.94,21.63)
SPICLK: length 9.3
  TOP w0.15: U2.6 23.89,23.37 23.63,23.11 22.04,23.11 21.24,23.91 21.24,25.71 19.79,27.16 U1.33
SPICS0: length 12.4
  TOP w0.15: U2.1 26.4,29.81 25.95,29.81 25.84,29.91 v1(25.83,29.91) ; v1(17.34,26.83) 17.41,26.76 U1.32
  BOTTOM w0.15: v1(17.34,26.83) 18.96,26.83 19.34,27.21 19.34,29.11 20.14,29.91 v1(25.83,29.91)
SPID: length 7.7
  TOP w0.15: U1.35 21.19,27.96 21.74,27.41 21.74,24.54 22.2,24.09 U2.5
SPIHD: length 10.7
  TOP w0.15: U1.30 19.09,25.96 19.32,25.74 20.22,25.74 20.64,25.31 20.64,23.21 21.24,22.61 24.44,22.61 25.16,23.33 U2.7
SPIQ: length 9.2
  TOP w0.15: v1(24.59,29.11) 24.59,29.64 24.74,29.78 U2.2 ; U1.34 20.24,27.56 20.54,27.26 v1(20.54,27.21)
  BOTTOM w0.15: v1(24.59,29.11) 24.27,28.79 21.02,28.79 20.54,28.31 v1(20.54,27.21)
SPIWP: length 8.6
  TOP w0.15: v1(19.84,26.21) 19.69,26.36 U1.31 ; v1(23.29,29.31) 23.42,29.31 U2.3
  BOTTOM w0.15: v1(23.29,29.31) 20.64,29.31 19.84,28.51 v1(19.84,26.21)
TP_RST: length 71.6
  TOP w0.15: U4.15 63.63,24.63 v1(63.14,25.11) ; v1(7.54,25.41) 8,25.41 8.45,25.86 8.45,27.81 8.99,28.36 U1.7
  BOTTOM w0.15: v1(63.14,25.11) 62.69,25.11 61.59,24.01 32.94,24.01 28.24,19.31 11.54,19.31 10.74,20.11 10.74,25.01 10.34,25.41 v1(7.54,25.41)
TS: length 4.4
  TOP w0.15: R15.1 29.45,10.7 29.24,10.91 29.24,12.11 28.69,12.67 U6.31
USB_DN: length 5.8
  TOP w0.151: J1.A7 5.56,15.79 5.24,16.11 5.24,16.51 5.53,16.79 J1.B7 6.39,16.72 8.55,16.72 8.88,17.05 R7.1
USB_DP: length 5
  TOP w0.151: 7.34,16.31 7.4,16.37 8.49,16.37 8.82,16.04 R8.1 ; 7.34,16.31 7.44,16.21 7.44,15.64 7.1,15.29 J1.B6 ; 7.34,16.31 7.29,16.37 6.39,16.37 J1.A6
VRTC: length 2.8
  TOP w0.127: 26.73,11.5 U6.28
  TOP w0.3: v1(27.22,9.99) C58.1 26.53,10.7 26.73,10.9 26.73,11.5
N01130: length 5.9
  TOP w0.131: U1.3 10.45,29.96 10.32,30.09 10.59,30.36 U1.2
  TOP w0.508: L6.1 8.31,30.45 8.67,30.09 10.32,30.09
N03351: length 9.6
  TOP w0.15: L5.2 8.96,36.83 C13.1 8.96,41.93 arc(9.37,42.91) 10.34,43.31 12.64,43.31 ANT1.1
N04664: length 3.1
  TOP w0.15: C14.1 14.51,35.98 14.52,35.99 14.52,35.09 14.42,34.99 L7.2
N11192: length 3.1
  TOP w0.127: U6.22 24.33,11.32 24.37,11.29
  TOP w0.254: 24.37,11.29 24.37,11.17 25.03,10.51 L4.1
N11703: length 2.6
  TOP w0.15: 27.62,17.62 27.53,17.53 U6.1
  TOP w0.254: D1.1 27.62,17.62
N11707: length 1.8
  TOP w0.254: R3.2 28.87,20.79 28.51,21.14 D1.2
N11773: length 2.7
  TOP w0.15: U6.2 27.13,17.96 26.3,18.79 C16.2 26.33,19.23
N17818: length 1.8
  TOP w0.254: R4.1 5.87,8.94 5.87,8.94 Q1.1
N17977: length 2.8
  TOP w0.15: R5.2 8.23,17.6 7.93,17.29 J1.A5
N18429: length 2.8
  TOP w0.15: J1.B5 7.96,14.29 8.23,14.03 R6.2
N19355: length 4.9
  TOP w0.15: C25.1 C27.1 52.81,29.97 53.14,30.31 54.44,30.31 54.69,30.56 IC1.12
N20097: length 3.4
  TOP w0.15: IC1.13 55.09,30.2 54.84,29.95 C26.1 C28.2
N20546: length 2.5
  TOP w0.15: IC1.14 55.49,30.31 55.85,29.95 C29.1
N20555: length 2.7
  TOP w0.15: C30.1 56.87,29.99 55.89,30.96 IC1.15
N21105: length 3.2
  TOP w0.15: IC1.16 57.34,32.52 57.64,32.21 57.64,31.31 57.94,31.01 58.6,31.01 C31.2
N21209: length 2.4
  TOP w0.15: IC1.17 57.44,32.92 58.27,32.08 C32.2
N21523: length 2.1
  TOP w0.15: C34.2 58.04,33.11 57.84,33.32 IC1.18
N21649: length 2.5
  TOP w0.15: C35.1 62.22,34.14 62.64,33.71 62.64,32.96 U5.1
N23102: length 3
  TOP w0.15: IC1.20 57.25,34.12 57.54,34.41 57.54,35.14 57.69,35.29 R10.2
N24693: length 1
  TOP w0.15: R11.1 C39.2
N24991: length 1
  TOP w0.15: C40.2 R12.1
N25221: length 2.8
  TOP w0.15: C42.2 54,11.76 54.24,11.52 54.24,10.71 54.39,10.56 U9.2
N29972: length 2.4
  TOP w0.254: J8.2 65.37,5.87 65.81,6.31 L8.1
N29976: length 2.4
  TOP w0.254: L9.1 63.6,6.66 64.12,6.14 J8.1
N32029: length 37.3
  TOP w0.15: U10.2 23.56,41.73 24.14,42.31 30.34,42.31 31.94,43.91 46.14,43.91 47.04,43.01 47.04,42.11 47.94,41.21 48.94,41.21 49.64,41.91 54.64,41.91 55.38,42.65 U11.4
N32033: length 48.7
  TOP w0.15: v1(55.34,5.71) 55.38,5.67 U13.4 ; U11.2 50.48,40.16 50.24,39.91 v1(48.94,39.91) ; v1(52.54,25.31) v1(52.54,14.31)
  BOTTOM w0.15: v1(52.54,14.31) 52.54,13.41 51.94,12.81 50.84,12.81 49.54,11.51 49.54,6.31 50.14,5.71 v1(55.34,5.71) ; v1(48.94,39.91) 48.94,25.91 49.54,25.31 v1(52.54,25.31)
N32082: length 24.6
  TOP w0.15: 28.46,4.1 29.41,4.1 29.42,4.11 30.84,4.11 31.24,3.71 31.24,1.71 32.15,0.8 U13.2
N41828: length 2.8
  TOP w0.15: Q2.3 60.27,17.06 R20.2
N42137: length 1.3
  TOP w0.15: U7.4 49.92,14.04 49.95,14 C69.1
N42835: length 2.6
  TOP w0.15: 47.72,15.56 47.74,15.59 47.74,16.01 47.6,16.16 C72.1 47.6,17.52 47.65,17.57 R22.2
N43955: length 3.4
  TOP w0.15: R23.2 C75.1 45.03,13.62 44.73,13.93 U8.12

## Copper pours and planes (outline as drawn; the poured copper is in the pictures)
VBAT on TOP: 5.74,7.81 7.14,7.81 7.34,7.61 7.34,4.21 6.74,3.61 5.54,3.61 5.24,3.91 5.24,7.31
VBAT_IN on TOP: 7.64,8.81 11.24,8.81 11.84,8.21 11.84,4.01 11.74,3.91 10.74,3.91 10.54,4.11 10.54,7.11 10.24,7.41 7.74,7.41 7.54,7.61 7.54,8.71
VBUS_5V on TOP: 2.64,19.41 4.94,19.41 5.04,19.31 5.04,17.31 4.74,17.01 4.74,14.71 5.04,14.41 5.04,12.81 4.84,12.61 2.64,12.61 2.44,12.81 2.44,19.21
VCC_3V3 on TOP: 20.94,12.01 22.84,12.01 23.74,11.11 23.74,6.11 23.44,5.81 21.54,5.81 21.24,6.11 21.24,8.21 20.84,8.61 20.84,11.91
VCC_5V on TOP: 27.94,27.71 33.74,27.71 34.94,26.51 41.64,26.51 41.94,26.21 41.94,25.61 41.74,25.41 35.34,25.41 34.94,25.01 34.94,23.01 34.24,22.31 32.24,22.31 30.04,24.51 28.04,24.51 27.24,25.31 27.24,27.01
VCC_5V on TOP: 28.94,14.81 29.54,14.81 30.44,13.91 31.34,13.91 31.54,13.71 31.54,12.81 31.44,12.71 30.54,12.71 28.84,14.41 28.84,14.71
VCC_5V on PWR: 28.14,27.41 33.54,27.41 35.14,25.81 35.14,13.51 34.14,12.51 30.64,12.51 30.24,12.91 30.24,13.41 31.44,14.61 33.84,14.61 34.04,14.81 34.04,16.21 32.94,17.31 23.14,17.31 22.34,16.51 22.34,11.41 22.74,11.01 26.24,11.01 26.54,10.81 26.54,10.21 26.14,9.81 21.04,9.81 20.44,10.41 20.44,17.61 21.94,19.11 31.74,19.11 31.74,23.21 30.04,24.91 28.14,24.91 27.44,25.61 27.44,26.71
ESP_3V3 on TOP: 1.24,35.41 2.64,35.41 2.84,35.21 2.84,33.71 2.44,33.31 2.44,31.11 2.64,30.91 6.04,30.91 6.24,30.71 6.24,30.11 6.04,29.91 4.84,29.91 4.74,29.81 4.74,28.61 4.54,28.41 1.44,28.41 1.14,28.71 1.14,35.31
N11192 on TOP: 24.34,11.21 24.64,11.21 25.54,10.31 25.54,7.91 25.44,7.81 24.64,7.81 24.54,7.91 24.54,10.51 24.24,10.81 24.24,11.11
